# Altium PCB PCB_NHUNG.PcbDoc
Units mm, origin at the board's own origin, x right, y up, seen from the top; angles counter-clockwise.
Board outline 75.31 x 100.2 mm, 2 copper layers (Top Layer, Bottom Layer); 18 components, 15 nets, 75 pads, 0 vias.
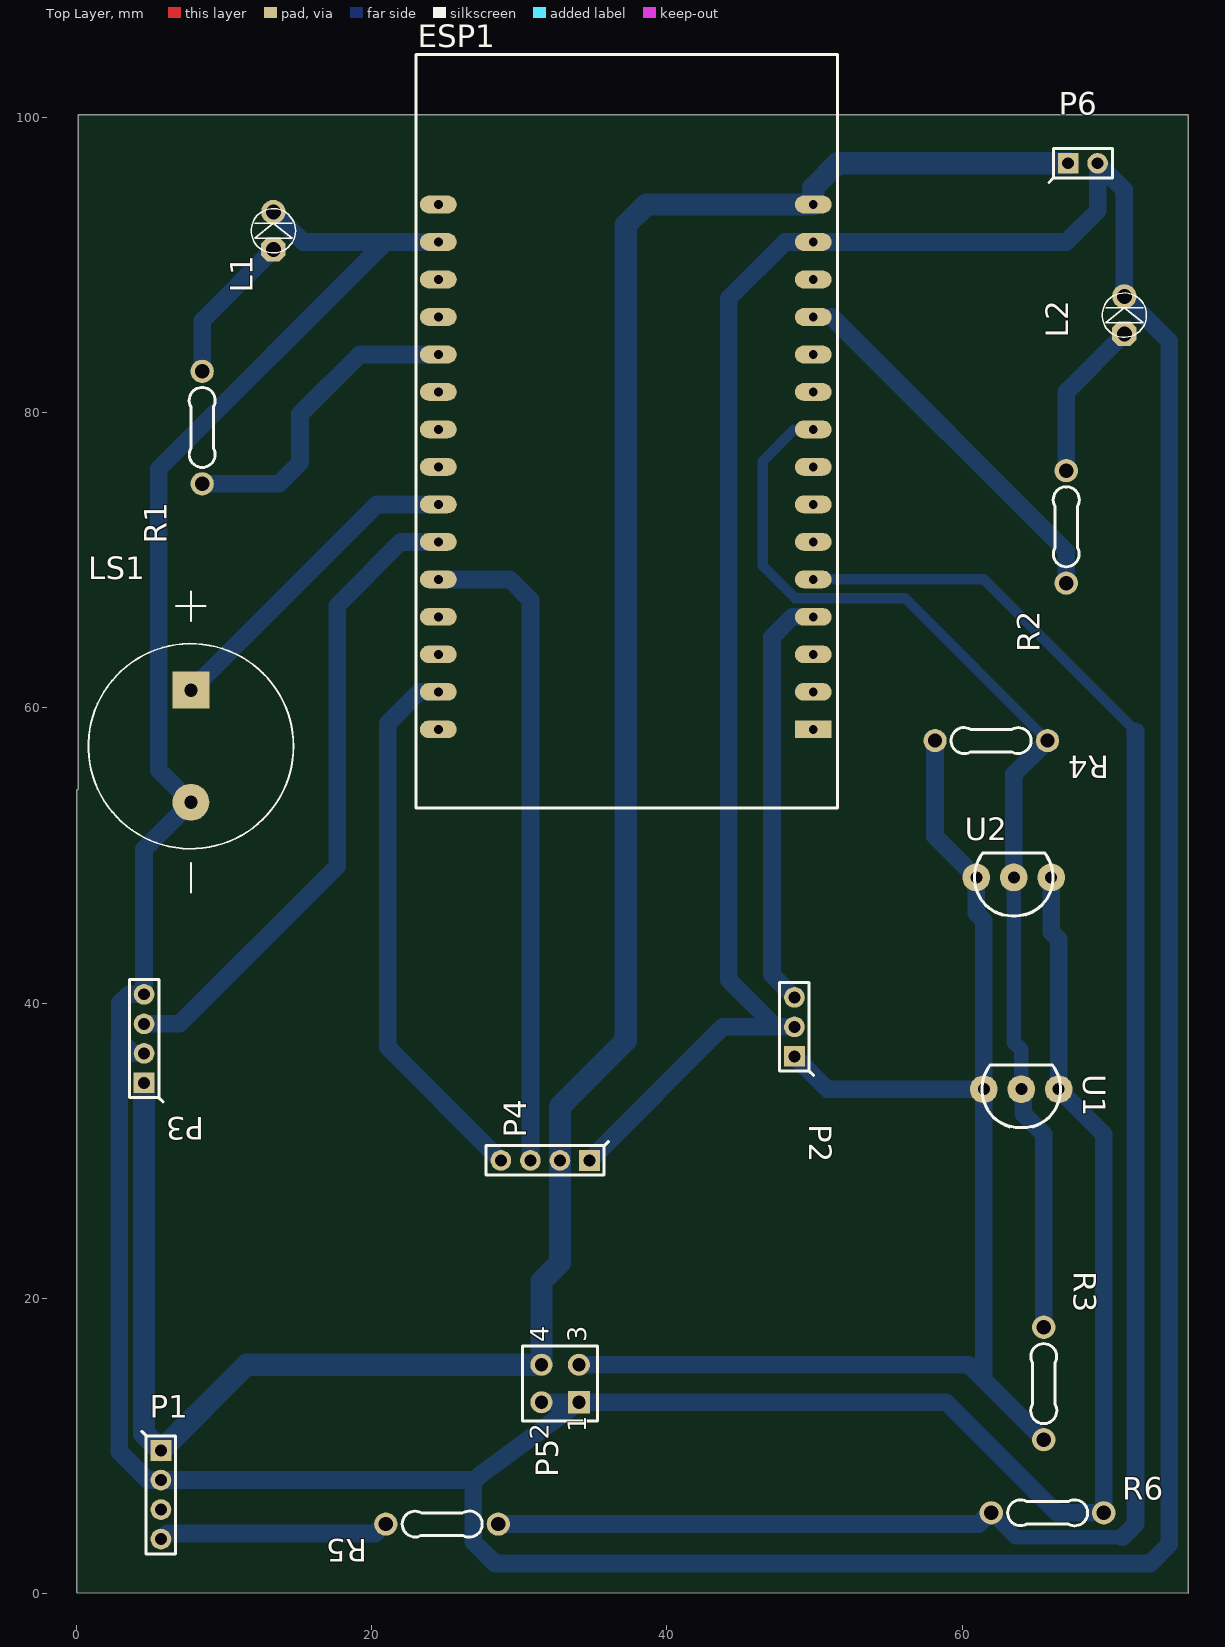
[diagram p0: Top Layer view]
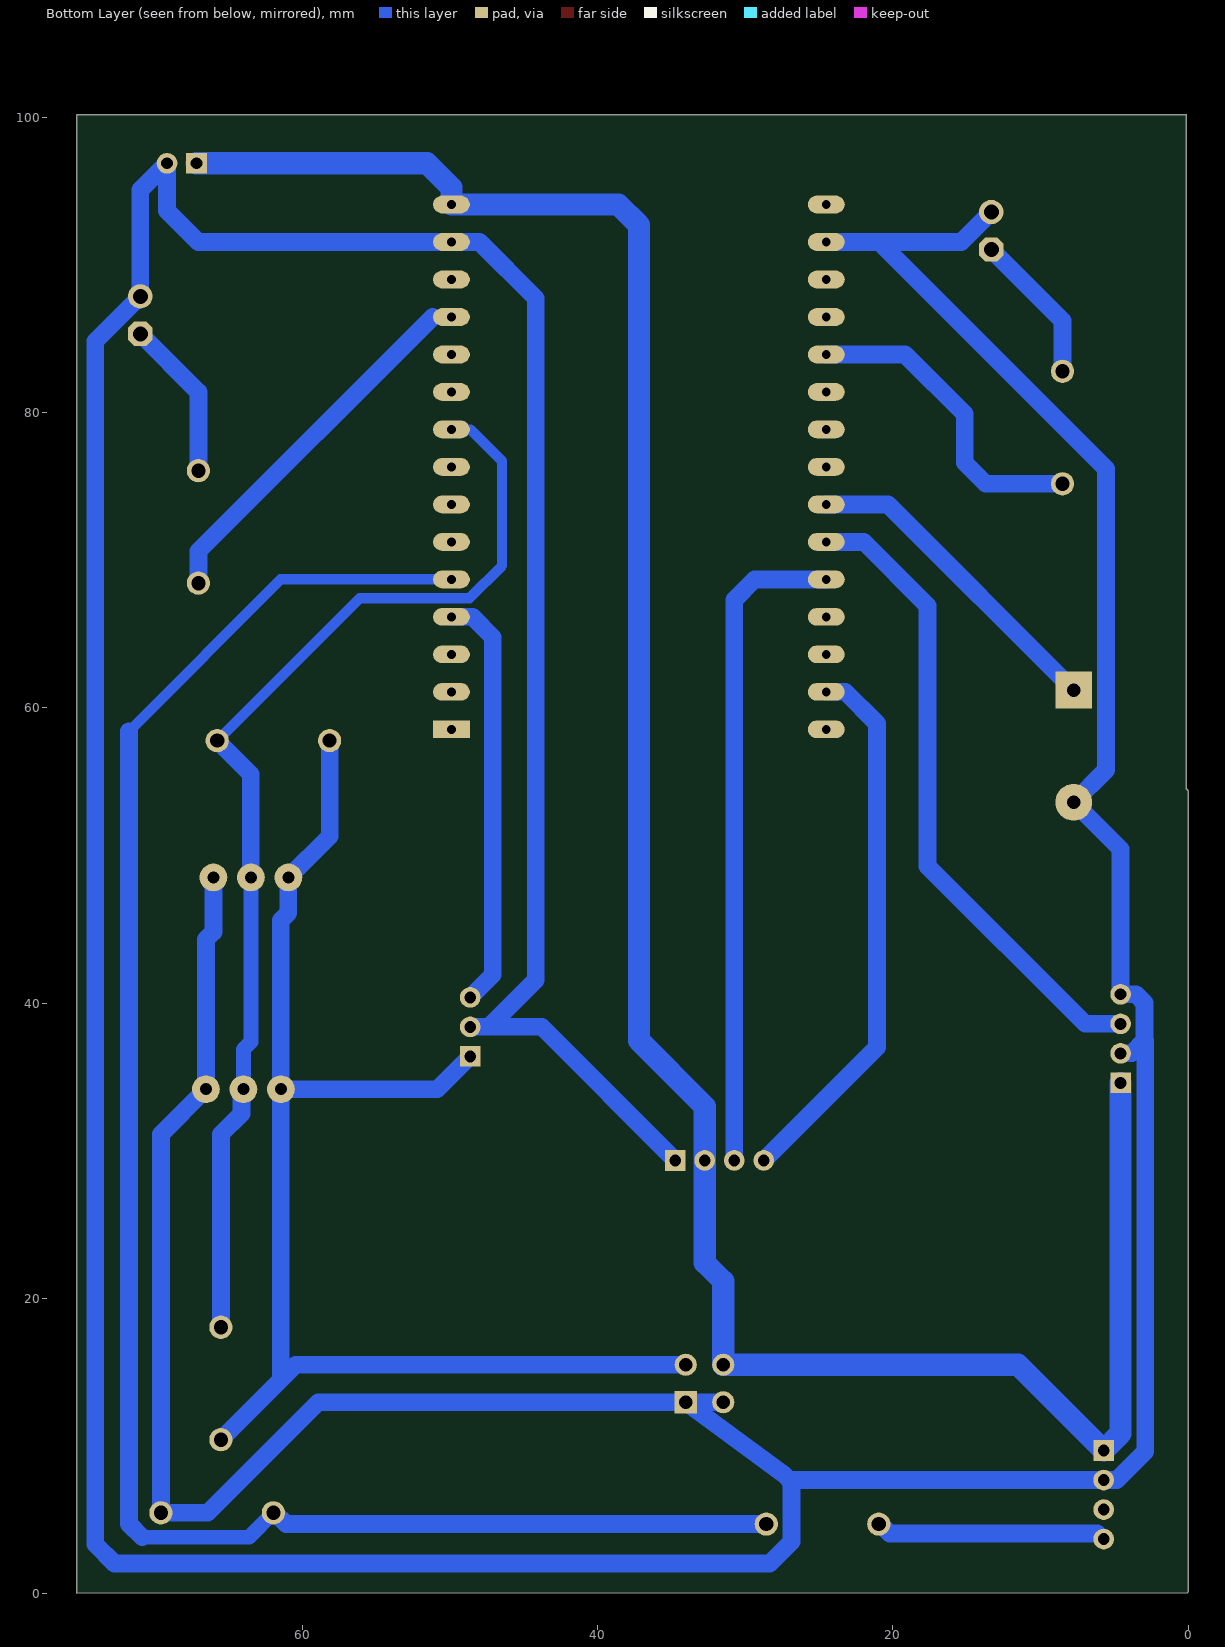
[diagram p1: Bottom Layer view, seen from below]
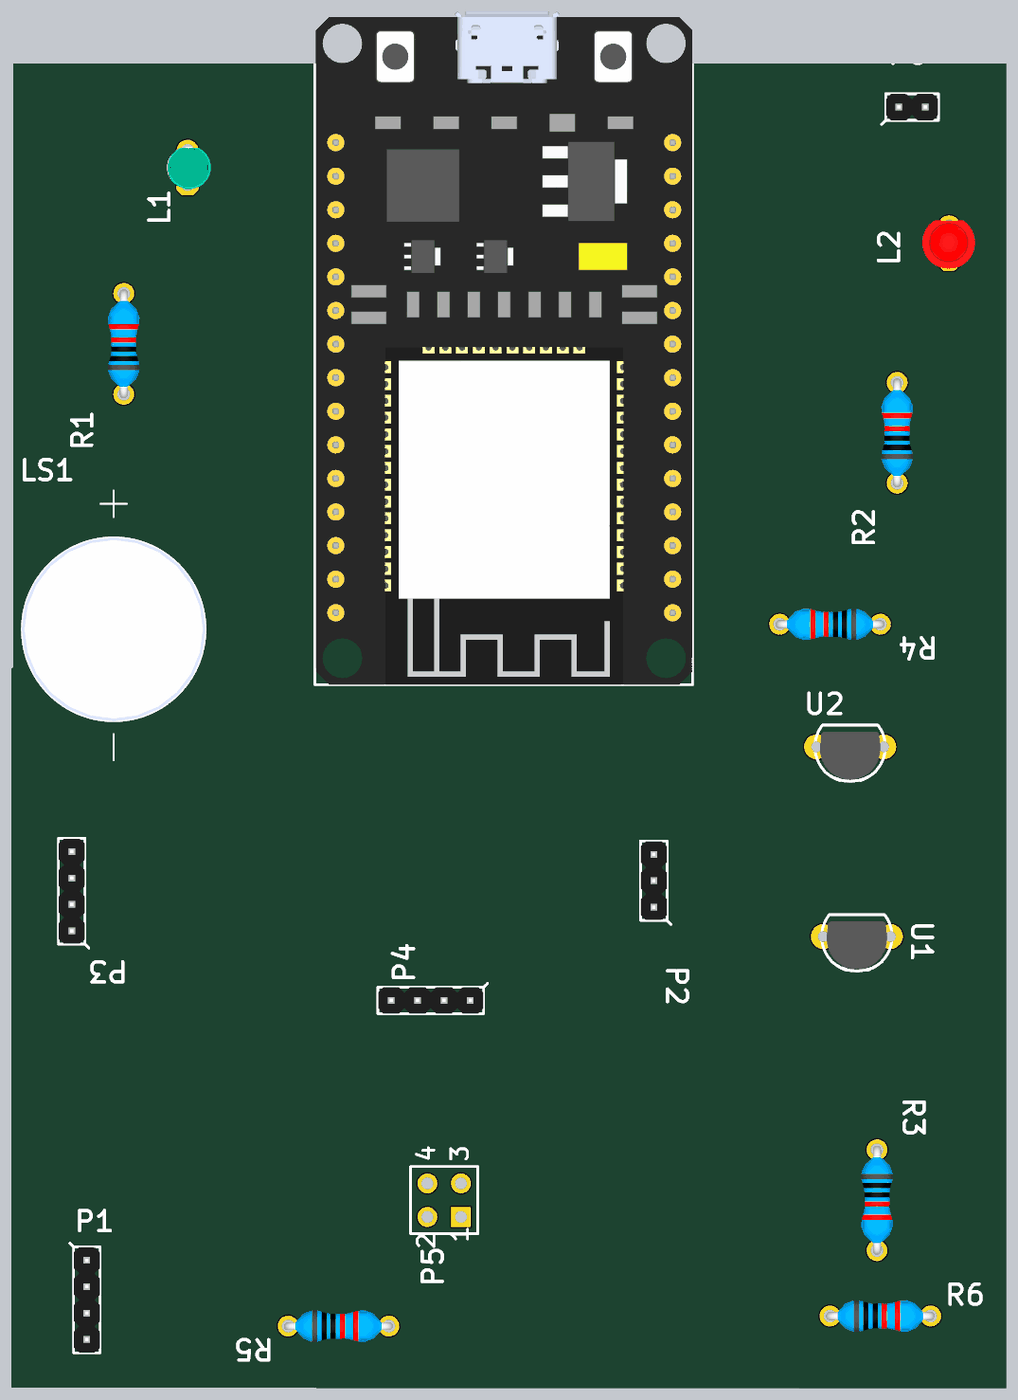
[diagram p2: 3D render of the assembled board from above, using the file's embedded part models]

## Layer stack, top to bottom
Top Solder: solder mask 0.0102, Solder Resist, Dk 3.5
Top Layer: signal copper 0.0356
Dielectric 1: dielectric 0.32, FR-4, Dk 4.8
Bottom Layer: signal copper 0.0356
Bottom Solder: solder mask 0.0102, Solder Resist, Dk 3.5

## Board outline
0.127,54.483 0.127,100.203 75.311,100.203 75.311,0 0.037,0.037 0,0.127 0,54.356 cw(c0.127,54.356)

## Design rules (kind name [scope] priority, off if disabled: settings)
Clearance [All] p1: gap=0.31 ignorepadtopadclearanceinfootprint=FALSE
PolygonConnect [All] p1: connectstyle=Relief reliefconductorwidth=0.254 reliefentries=4 polygonreliefangle="90 Angle" airgapwidth=0.254
RoutingLayers [All] p1: top layer_v5=FALSE bottom layer_v5=TRUE
RoutingVias [All] p1: holewidth=0.711 width=1.27 viastyle="Through Hole" minholewidth=0.711 minwidth=1.27 maxholewidth=0.711 maxwidth=1.27
SolderMaskExpansion [All] p1: expansion=0.102 istentingtop=FALSE
Width 3V [InNet('3V')] p1: maxlimit=1.6 minlimit=0.5 preferedwidth=1.2
Width GND [InNet('GND')] p2: maxlimit=1.6 minlimit=0.5 preferedwidth=1.2
Width 5V [InNet('Vcc')] p3: maxlimit=2 minlimit=0.5 preferedwidth=1.5
Width [All] p4: maxlimit=1.2 minlimit=0.2 preferedwidth=0.3
29 further rules are at their usual default settings.

## Components (designator, comment, footprint, x,y, rotation, side; value= is the part's Value field where it differs from the comment)
ESP1 "ESP32 DEVKIT" "ESP32 WROOM 32 KIT" 49.911,58.547 r180 top
L1 "LED 3mm" LED-3MM-GREEN 13.335,91.059 r90 top
L2 "LED 3mm" LED-3MM-RED 70.993,85.344 r90 top
LS1 "CPI-148-24-90T-67" XDCR_CPI-148-24-90T-67 7.747,57.404 r270 top
P1 "Header 4" HDR/Header/4/2mm 5.715,6.683 r270 top
P2 "Header 3" HDR/Header/3/2mm 48.641,38.386 r90 top
P3 "Header 4" HDR/Header/4/2mm 4.572,37.592 r90 top
P4 "Header 4" HDR/Header/4/2mm 31.75,29.337 r180 top
P5 "Header 2X2" HDR2X2 34.036,12.954 r90 top
P6 "Header 2" HDR/Header/2/2mm 68.183,96.901 r0 top
R1 "330" "R 1/4W/300" 8.509,75.184 r90 top
R2 "330" "R 1/4W/300" 67.056,68.453 r90 top
R3 "10k" "R 1/4W/300" 65.532,18.034 r270 top
R4 "10k" "R 1/4W/300" 65.786,57.785 r180 top
R5 "330" "R 1/4W/300" 20.955,4.699 r0 top
R6 "330" "R 1/4W/300" 61.976,5.461 r0 top
U1 "DS18B20" TO-92-AMMO 64.008,34.163 r180 top
U2 "DS18B20" TO-92-AMMO 63.5,48.514 r180 top

## Footprints (in the part's own frame and the unit in brackets; to place one, negate y for a bottom-side part, rotate by r counter-clockwise, add the part's x,y. Pads: shape width x height; smd on the part's side, far side on the other; paste and mask are expansions set on the pad)
"ESP32 WROOM 32 KIT" [mm]
  rect 2.5x1.2 hole 0.6: 1(0,0)
  oval 2.5x1.2 hole 0.6: 2(0,-2.54) 3(0,-5.08) 4(0,-7.62) 5(0,-10.16) 6(0,-12.7) 7(0,-15.24) 8(0,-17.78) 9(0,-20.32) 10(0,-22.86) 11(0,-25.4) 12(0,-27.94) 13(0,-30.48) 14(0,-33.02) 15(0,-35.56) 16(25.4,-35.56) 17(25.4,-33.02) 18(25.4,-30.48) 19(25.4,-27.94) 20(25.4,-25.4) 21(25.4,-22.86) 22(25.4,-20.32) 23(25.4,-17.78) 24(25.4,-15.24) 25(25.4,-12.7) 26(25.4,-10.16) 27(25.4,-7.62) 28(25.4,-5.08) 29(25.4,-2.54) 30(25.4,0)
  silkscreen extent -1.65,-45.72 26.92,5.33, body extent -1.65,-45.6 26.85,5.33, height 10.49
HDR2X2 [mm] "Connector; Header; 2x2 Position"
  rect 1.5x1.5 hole 0.9: 1(0,0)
  round 1.5 hole 0.9: 2(0,2.54) 3(2.54,0) 4(2.54,2.54)
  silkscreen extent -1.27,-1.27 3.81,3.81
HDR/Header/2/2mm [mm]
  rect 1.4x1.4 hole 0.8: 1(-1,0)
  round 1.4 hole 0.8: 2(1,0)
  silkscreen extent -2.3,-1.3 2,1, body extent -1.98,-1 1.97,1, height 6
HDR/Header/3/2mm [mm]
  rect 1.4x1.4 hole 0.8: 1(-2,0)
  round 1.4 hole 0.8: 2(0,0) 3(2,0)
  silkscreen extent -3.3,-1.3 3,1, body extent -2.98,-1 2.97,1, height 6
HDR/Header/4/2mm [mm]
  rect 1.4x1.4 hole 0.8: 1(-3,0)
  round 1.4 hole 0.8: 2(-1,0) 3(1,0) 4(3,0)
  silkscreen extent -4.3,-1.3 4,1, body extent -3.98,-1 3.97,1, height 6
LED-3MM-GREEN [mil]
  oct 65x65 hole 40: 1(0,0)
  round 65 hole 40: 2(100,0)
  silkscreen extent -9,-59 109,59, body extent -15,-70 112,60, height 182
LED-3MM-RED [mil]
  oct 65x65 hole 40: 1(0,0)
  round 65 hole 40: 2(100,0)
  silkscreen extent -9,-59 109,59, body extent -27,-77 117,80, height 181
"R 1/4W/300" [mil] "Through hole resitor, axial 300mils, 1/4W"
  round 62 hole 38: 1(0,0) 2(300,0)
  silkscreen extent 44,-35 257,35, body extent -12,-47 312,47, height 97
TO-92-AMMO [mil]
  round 74 hole 32 mask+4.02: 1(-100,0) 2(0,0) 3(100,0)
  silkscreen extent -105,-65 105,103, body extent -90,-45 90,98, height 805
XDCR_CPI-148-24-90T-67 [mm]
  round 2.5 hole 0.9: N(3.8,0)
  rect 2.5x2.5 / inner round 2.5 / far side rect 2.5x2.5 hole 0.9: P(-3.8,0)
  silkscreen extent -10.49,-6.95 9.92,6.95, body extent -6.95,-6.95 6.95,6.95, height 7.5

## Part data
ESP1: library part "ESP32 WROOM 32 KIT"
L1: library part "LED 3mm Xanh La", "Cắm", Chung_Loai=Cắm, Don_Vi=Con, Ma_Hang=MH001054, Ten_Linh_Kien="Led 3MM Phủ Xanh (10c)"
L2: library part "LED 3mm Do", "Cắm", Chung_Loai=Cắm, Don_Vi=Con, Ma_Hang=MH003892, Ten_Linh_Kien="Led 3MM Phủ Đỏ (10c)"
LS1: "13,9 Ð¼Ð¼, 24 Ð’ Ð¿Ð¾ÑÑ‚. Ñ‚Ð¾ÐºÐ°, 90 Ð´Ð‘, ÑÐºÐ²Ð¾Ð·Ð½Ð¾Ðµ Ð¾Ñ‚Ð²ÐµÑ€ÑÑ‚Ð¸Ðµ, Ð¿ÑŒÐµÐ·Ð¾ÑÐ»ÐµÐºÑ‚Ñ€Ð¸Ñ‡ÐµÑÐºÐ¸Ð¹ Ð·Ð²ÑƒÐºÐ¾Ð²Ð¾Ð¹ Ð¸Ð½Ð´Ð¸ÐºÐ°Ñ‚Ð¾Ñ€", PACKAGE=None, Check_prices=https://www.snapeda.com/parts/CPI-148-24-90T-67/Same+Sky/view-part/?ref=eda, MF="Same Sky", MP=CPI-148-24-90T-67, SnapEDA_Link=https://www.snapeda.com/parts/CPI-148-24-90T-67/Same+Sky/view-part/?ref=snap
P1 P3 P4: "Header, 4-Pin"
P2: "Header, 3-Pin"
P5: "Header, 2-Pin, Dual row", LatestRevisionDate=17-Jul-2002, LatestRevisionNote="Re-released for DXP Platform.", Publisher="Altium Limited"
P6: "Header, 2-Pin"
R1 R2 R3 R4 R5 R6: library part Resistor, "Resistor"
U1 U2: "Temperature Sensor Digital, Local -55Â°C ~ 125Â°C 12 b 8-uMAX/uSOP", PACKAGE="TO-92-3 Maxim", Check_prices=https://www.snapeda.com/parts/DS18B20/Analog+Devices/view-part/?ref=eda, MF="Analog Devices", MP=DS18B20, SnapEDA_Link=https://www.snapeda.com/parts/DS18B20/Analog+Devices/view-part/?ref=snap

## Nets (pads, with @x,y where several pads share a name; then routed paths per layer and width w, separated by ;. In a path a pad name is that pad's centre, name@x,y a point inside that pad or via, vN(x,y) a via of type N, cw(c..) or ccw(c..) an arc to the next point about the centre after c; other vN are vias at no path point)
3V: P2.1 P5.3 R3.2 R4.2 U1.3 U2.3 | length 92
  Bottom Layer w1.2: P5.3 60.452,15.494 61.468,14.478 ; P2.1 50.864,34.163 U1.3 ; R4.2 58.166,51.308 U2.3 60.96,46.101 61.468,45.593 U1.3 ; R3.2 61.468,14.478 ; 61.468,14.478 U1.3
GND: ESP1.14 ESP1.17 L1.2 L2.2 LS1.N P1.2 P2.2 P3.2 P3.4 P4.1 P5.1 P5.2 P6.2 R6.2 U1.1 U2.1 | length 472.2
  Bottom Layer w1.2: 2.896,37.465 2.896,9.613 4.826,7.683 P1.2 26.873,7.683 ; P3.2 3.819,36.592 2.946,37.465 2.946,40.005 3.533,40.592 P3.4 4.572,50.429 LS1.N 5.563,55.788 5.563,76.2 20.93,91.567 ; L1.2 15.367,91.567 20.93,91.567 ; ESP1.17 20.93,91.567 ; P5.2 P5.1 ; P4.1 43.799,38.386 47.371,38.386 ; P2.2 47.371,38.386 ; U2.1 66.04,44.817 66.548,44.309 U1.1 69.596,31.115 R6.2 66.421,5.461 58.928,12.954 P5.1 ; P5.1 27.366,8.045 26.873,7.553 26.873,3.505 28.346,2.032 72.746,2.032 74.041,3.327 74.041,84.836 L2.2 70.993,95.091 P6.2 69.183,93.694 67.056,91.567 ESP1.14 48.006,91.567 44.196,87.757 44.196,41.561 47.371,38.386
NetESP1_4: ESP1.4 P2.3 | length 28.4
  Bottom Layer w1.2: P2.3 47.117,41.91 47.117,64.795 48.489,66.167 ESP1.4
NetESP1_5: ESP1.5 R5.2 R6.1 | length 124.4
  Bottom Layer w0.7: ESP1.5 61.468,68.707 71.755,58.42
  Bottom Layer w1: R6.1 63.627,3.81 70.866,3.81
  Bottom Layer w1.2: R5.2 61.113,4.699 61.875,5.461 R6.1 ; 70.866,3.81 71.755,4.699 71.755,58.42
NetESP1_9: ESP1.9 R3.1 R4.1 U1.2 U2.2 | length 77.1
  Bottom Layer w0.7: ESP1.9 48.628,78.867 46.482,76.721 46.482,69.647 48.692,67.437 56.134,67.437 R4.1
  Bottom Layer w1: U2.2 63.5,37.363 64.008,36.855 U1.2
  Bottom Layer w1.2: U2.2 63.5,55.499 R4.1 ; U1.2 64.138,34.033 64.138,32.509 65.532,31.115 R3.1
NetESP1_12: ESP1.12 R2.1 | length 25.9
  Bottom Layer w0.3: ESP1.12 51.181,86.487
  Bottom Layer w1.2: 51.181,86.487 67.056,70.612 R2.1
NetESP1_20: ESP1.20 R1.1 | length 21.6
  Bottom Layer w1.2: R1.1 13.716,75.184 15.138,76.606 15.138,79.908 19.177,83.947 ESP1.20
NetESP1_24: ESP1.24 LS1.P | length 22
  Bottom Layer w1.2: LS1.P 20.33,73.787 ESP1.24
NetESP1_25: ESP1.25 P3.3 | length 43.8
  Bottom Layer w1.2: P3.3 6.969,38.592 17.653,49.276 17.653,66.929 21.971,71.247 ESP1.25
NetESP1_26: ESP1.26 P4.3 | length 44.8
  Bottom Layer w1.2: ESP1.26 29.353,68.707 30.75,67.31 P4.3
NetESP1_29: ESP1.29 P4.4 | length 37.1
  Bottom Layer w1.2: ESP1.29 23.228,61.087 21.082,58.941 21.082,37.005 P4.4
NetL1_1: L1.1 R1.2 | length 10.3
  Bottom Layer w1.2: R1.2 8.509,86.233 L1.1
NetL2_1: L2.1 R2.2 | length 10.9
  Bottom Layer w1.2: R2.2 67.056,81.407 L2.1
NetP1_4: P1.4 R5.1 | length 16.1
  Bottom Layer w0.3: P1.4 P1.4@6.096,4.064
  Bottom Layer w1.2: P1.4@5.78,3.748 5.807,3.721 6.15,4.064 20.219,4.064 20.854,4.699 R5.1
Vcc: ESP1.15 P1.1 P3.1 P4.2 P5.4 P6.1 | length 165.5
  Bottom Layer w1.5: P3.1 4.572,10.826 P1.1 11.526,15.494 P5.4 31.496,21.149 32.75,22.403 P4.2 32.75,32.995 37.211,37.456 37.211,92.71 38.608,94.107 ESP1.15 49.911,95.25 51.562,96.901 P6.1
pads on no net: ESP1.1 ESP1.2 ESP1.3 ESP1.6 ESP1.7 ESP1.8 ESP1.10 ESP1.11 ESP1.13 ESP1.16 ESP1.18 ESP1.19 ESP1.21 ESP1.22 ESP1.23 ESP1.27 ESP1.28 ESP1.30 P1.3

## Text inside footprints (layer, text, board x,y; h text height)
P5: Top Overlay "1" at 34.544,10.922 h1.27 r90; Top Overlay "2" at 32.004,10.414 h1.27 r90; Top Overlay "4" at 32.004,17.018 h1.27 r90; Top Overlay "3" at 34.544,17.018 h1.27 r90